# EAGLE board Panel (EAGLE 5.11), part 1 of 2
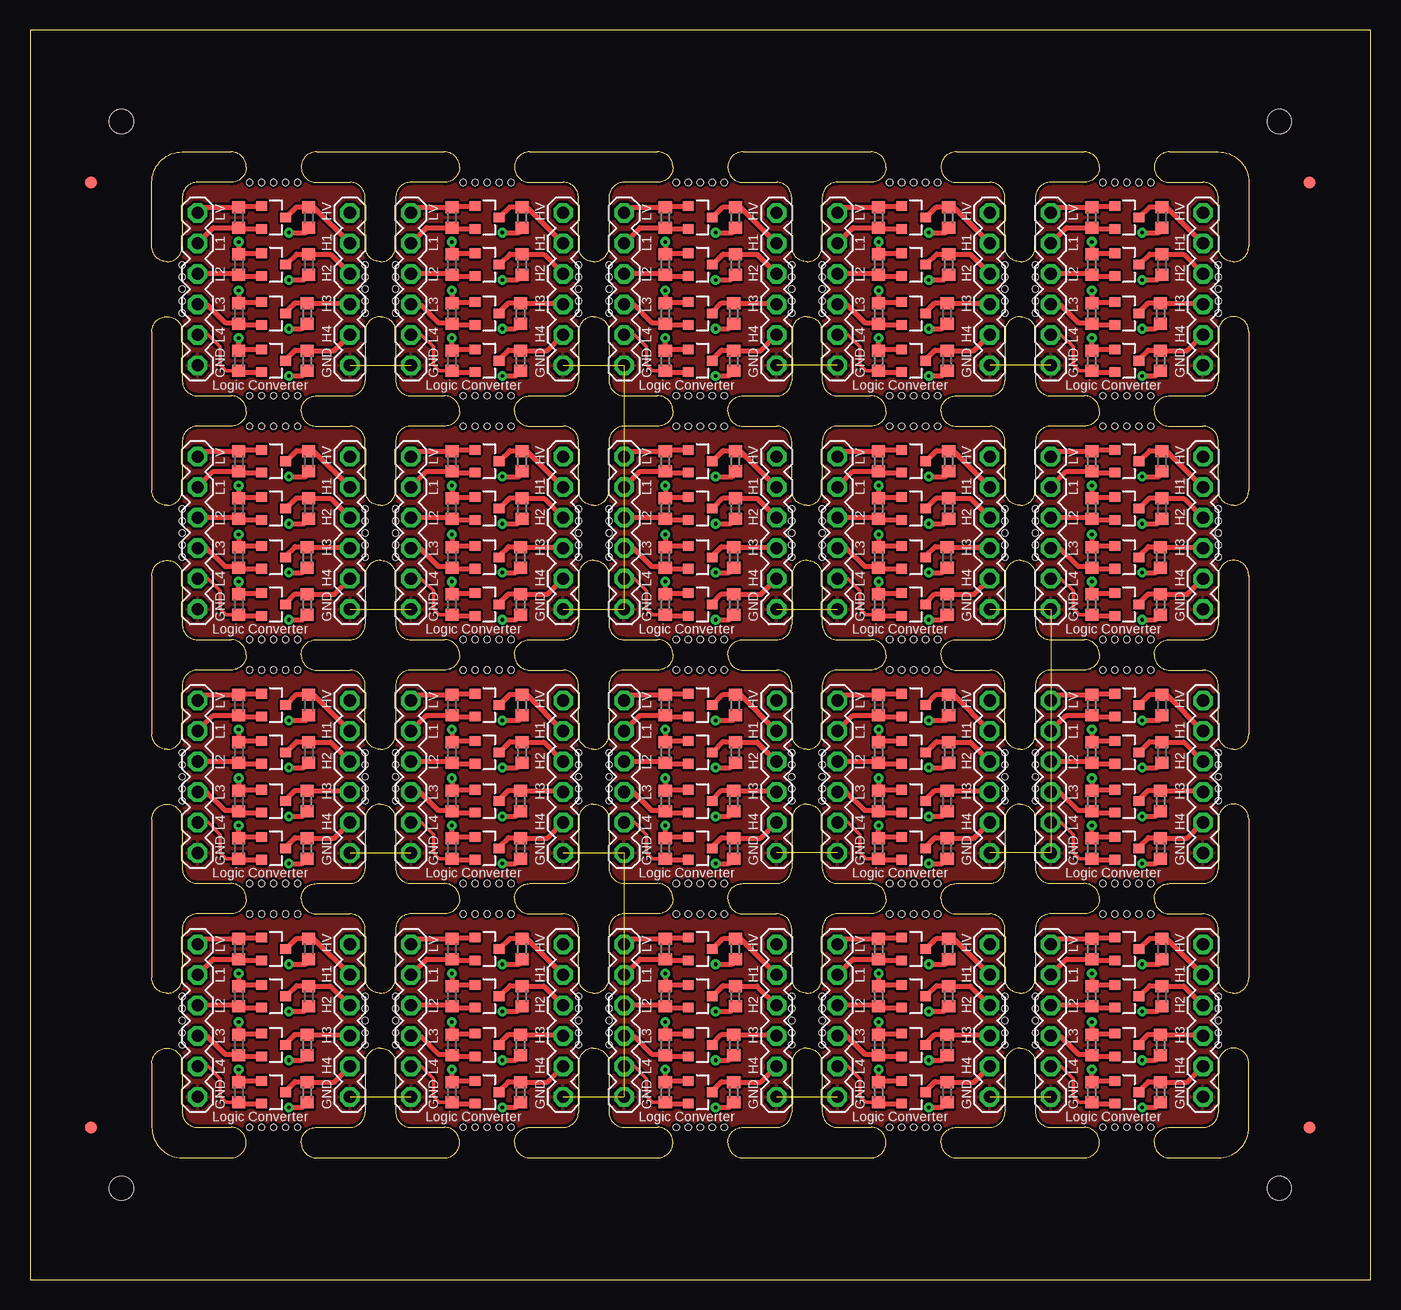
[diagram p0: board, top side]
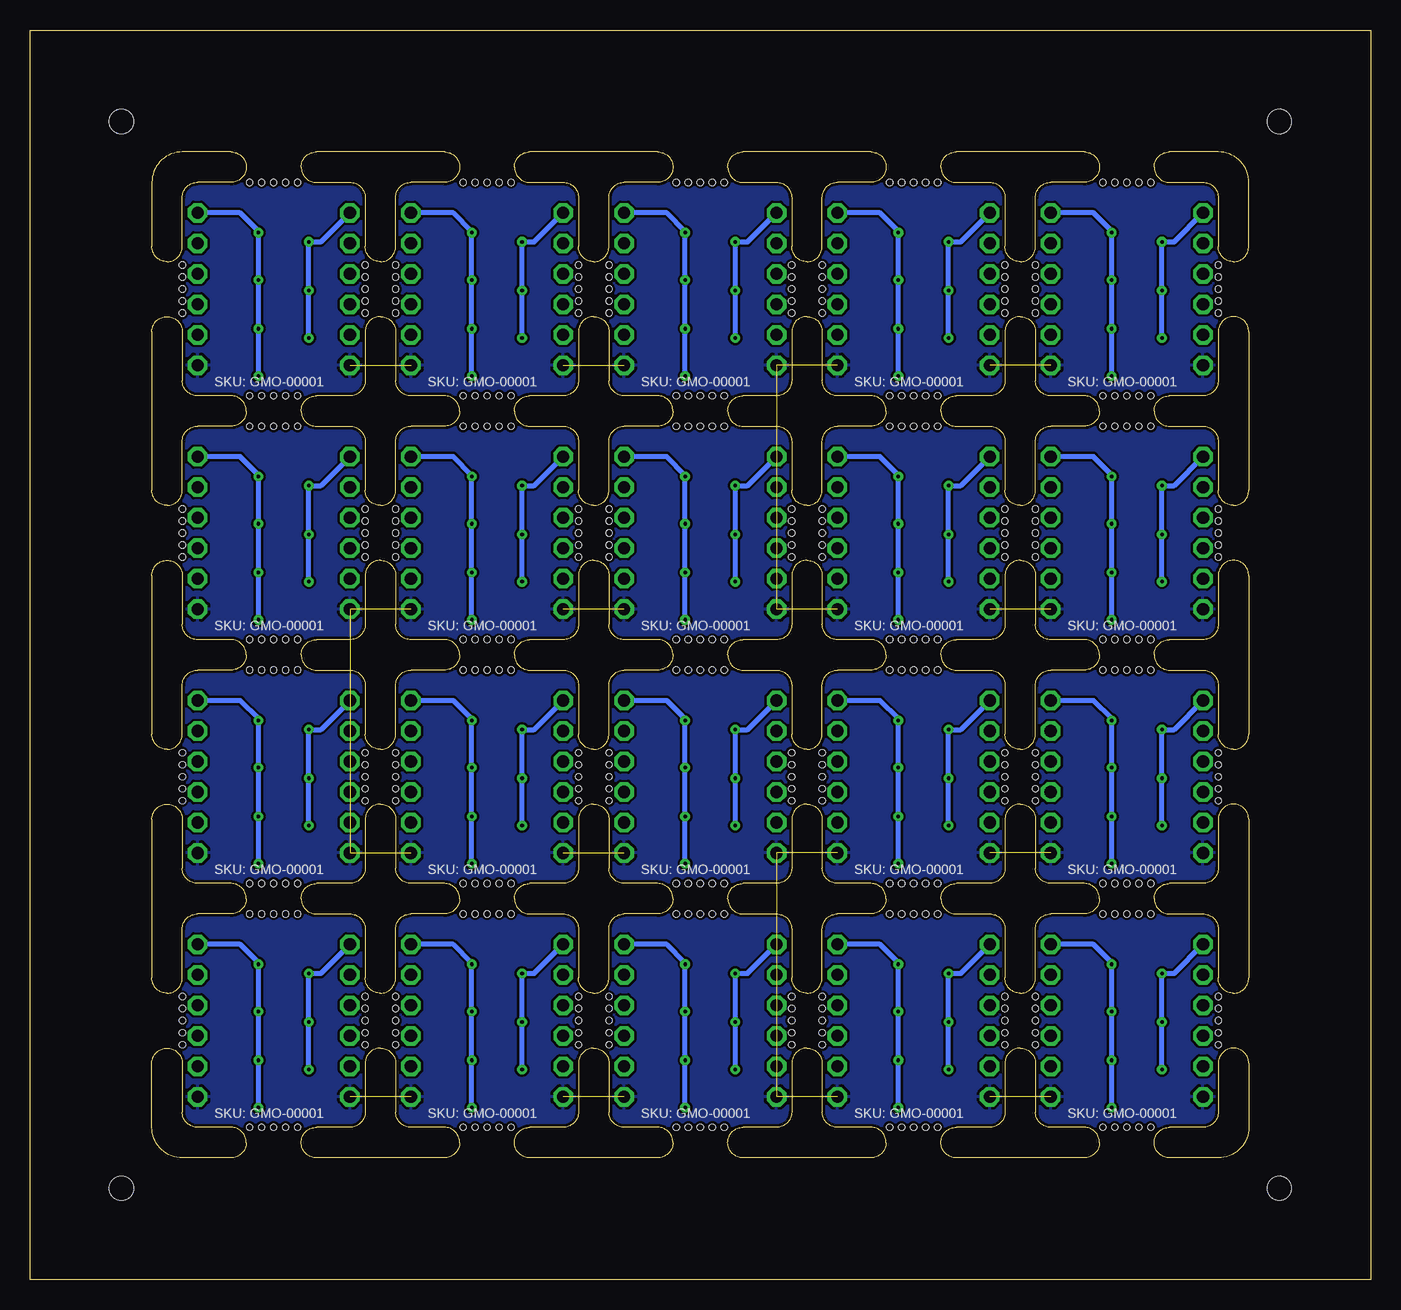
[diagram p1: board, bottom side, seen from below]

Size 111.76 x 104.14 mm. Coordinates in mm from the lower left corner, seen from the top.
Outline: 27.94,69.85 arc90 26.67,71.12
Outline: 27.94,69.85 27.94,65.79 arc90 29.21,64.52 arc90 30.48,65.79 30.48,69.85 arc-90 31.75,71.12 34.54,71.12 arc90 35.81,72.39 arc90 34.54,73.66 31.75,73.66 arc-90 30.48,74.93 30.48,78.99 arc90 29.21,80.26 arc90 27.94,78.99 27.94,74.93 arc-90 26.67,73.66 23.88,73.66 arc90 22.61,72.39 arc90 23.88,71.12 26.67,71.12
Outline: 27.94,69.85 arc90 26.67,71.12
Outline: 45.72,69.85 arc90 44.45,71.12
Outline: 45.72,69.85 45.72,65.79 arc90 46.99,64.52 arc90 48.26,65.79 48.26,69.85 arc-90 49.53,71.12 52.32,71.12 arc90 53.59,72.39 arc90 52.32,73.66 49.53,73.66 arc-90 48.26,74.93 48.26,78.99 arc90 46.99,80.26 arc90 45.72,78.99 45.72,74.93 arc-90 44.45,73.66 41.66,73.66 arc90 40.39,72.39 arc90 41.66,71.12 44.45,71.12
Outline: 45.72,69.85 arc90 44.45,71.12
Outline: 63.5,69.85 arc90 62.23,71.12
Outline: 63.5,69.85 63.5,65.79 arc90 64.77,64.52 arc90 66.04,65.79 66.04,69.85 arc-90 67.31,71.12 70.1,71.12 arc90 71.37,72.39 arc90 70.1,73.66 67.31,73.66 arc-90 66.04,74.93 66.04,78.99 arc90 64.77,80.26 arc90 63.5,78.99 63.5,74.93 arc-90 62.23,73.66 59.44,73.66 arc90 58.17,72.39 arc90 59.44,71.12 62.23,71.12
Outline: 63.5,69.85 arc90 62.23,71.12
Outline: 27.94,90.17 arc90 26.67,91.44
Outline: 27.94,90.17 27.94,86.11 arc90 29.21,84.84 arc90 30.48,86.11 30.48,90.17 arc-90 31.75,91.44 34.54,91.44 arc90 35.81,92.71 arc90 34.54,93.98 23.88,93.98 arc90 22.61,92.71 arc90 23.88,91.44 26.67,91.44
Outline: 27.94,90.17 arc90 26.67,91.44
Outline: 45.72,90.17 arc90 44.45,91.44
Outline: 45.72,90.17 45.72,86.11 arc90 46.99,84.84 arc90 48.26,86.11 48.26,90.17 arc-90 49.53,91.44 52.32,91.44 arc90 53.59,92.71 arc90 52.32,93.98 41.66,93.98 arc90 40.39,92.71 arc90 41.66,91.44 44.45,91.44
Outline: 45.72,90.17 arc90 44.45,91.44
Outline: 63.5,90.17 arc90 62.23,91.44
Outline: 63.5,90.17 63.5,86.11 arc90 64.77,84.84 arc90 66.04,86.11 66.04,90.17 arc-90 67.31,91.44 70.1,91.44 arc90 71.37,92.71 arc90 70.1,93.98 59.44,93.98 arc90 58.17,92.71 arc90 59.44,91.44 62.23,91.44
Outline: 63.5,90.17 arc90 62.23,91.44
Outline: 81.28,90.17 arc90 80.01,91.44
Outline: 81.28,90.17 81.28,86.11 arc90 82.55,84.84 arc90 83.82,86.11 83.82,90.17 arc-90 85.09,91.44 87.88,91.44 arc90 89.15,92.71 arc90 87.88,93.98 77.22,93.98 arc90 75.95,92.71 arc90 77.22,91.44 80.01,91.44
Outline: 81.28,90.17 arc90 80.01,91.44
Outline: 81.28,69.85 arc90 80.01,71.12
Outline: 81.28,69.85 81.28,65.79 arc90 82.55,64.52 arc90 83.82,65.79 83.82,69.85 arc-90 85.09,71.12 87.88,71.12 arc90 89.15,72.39 arc90 87.88,73.66 85.09,73.66 arc-90 83.82,74.93 83.82,78.99 arc90 82.55,80.26 arc90 81.28,78.99 81.28,74.93 arc-90 80.01,73.66 77.22,73.66 arc90 75.95,72.39 arc90 77.22,71.12 80.01,71.12
Outline: 81.28,69.85 arc90 80.01,71.12
Outline: 99.06,90.17 arc90 97.79,91.44
Outline: 99.06,90.17 99.06,86.11 arc90 100.33,84.84 arc90 101.6,86.11 101.6,91.44 arc90 99.06,93.98 95,93.98 arc90 93.73,92.71 arc90 95,91.44 97.79,91.44
Outline: 99.06,90.17 arc90 97.79,91.44
Outline: 99.06,69.85 arc90 97.79,71.12
Outline: 99.06,69.85 99.06,65.79 arc90 100.33,64.52 arc90 101.6,65.79 101.6,78.99 arc90 100.33,80.26 arc90 99.06,78.99 99.06,74.93 arc-90 97.79,73.66 95,73.66 arc90 93.73,72.39 arc90 95,71.12 97.79,71.12
Outline: 99.06,69.85 arc90 97.79,71.12
Outline: 27.94,29.21 arc90 26.67,30.48
Outline: 27.94,29.21 27.94,25.15 arc90 29.21,23.88 arc90 30.48,25.15 30.48,29.21 arc-90 31.75,30.48 34.54,30.48 arc90 35.81,31.75 arc90 34.54,33.02 31.75,33.02 arc-90 30.48,34.29 30.48,38.35 arc90 29.21,39.62 arc90 27.94,38.35 27.94,34.29 arc-90 26.67,33.02 23.88,33.02 arc90 22.61,31.75 arc90 23.88,30.48 26.67,30.48
Outline: 27.94,29.21 arc90 26.67,30.48
Outline: 45.72,29.21 arc90 44.45,30.48
Outline: 45.72,29.21 45.72,25.15 arc90 46.99,23.88 arc90 48.26,25.15 48.26,29.21 arc-90 49.53,30.48 52.32,30.48 arc90 53.59,31.75 arc90 52.32,33.02 49.53,33.02 arc-90 48.26,34.29 48.26,38.35 arc90 46.99,39.62 arc90 45.72,38.35 45.72,34.29 arc-90 44.45,33.02 41.66,33.02 arc90 40.39,31.75 arc90 41.66,30.48 44.45,30.48
Outline: 45.72,29.21 arc90 44.45,30.48
Outline: 63.5,29.21 arc90 62.23,30.48
Outline: 63.5,29.21 63.5,25.15 arc90 64.77,23.88 arc90 66.04,25.15 66.04,29.21 arc-90 67.31,30.48 70.1,30.48 arc90 71.37,31.75 arc90 70.1,33.02 67.31,33.02 arc-90 66.04,34.29 66.04,38.35 arc90 64.77,39.62 arc90 63.5,38.35 63.5,34.29 arc-90 62.23,33.02 59.44,33.02 arc90 58.17,31.75 arc90 59.44,30.48 62.23,30.48
Outline: 63.5,29.21 arc90 62.23,30.48
Outline: 27.94,49.53 arc90 26.67,50.8
Outline: 27.94,49.53 27.94,45.47 arc90 29.21,44.2 arc90 30.48,45.47 30.48,49.53 arc-90 31.75,50.8 34.54,50.8 arc90 35.81,52.07 arc90 34.54,53.34 31.75,53.34 arc-90 30.48,54.61 30.48,58.67 arc90 29.21,59.94 arc90 27.94,58.67 27.94,54.61 arc-90 26.67,53.34 23.88,53.34 arc90 22.61,52.07 arc90 23.88,50.8 26.67,50.8
Outline: 27.94,49.53 arc90 26.67,50.8
Outline: 45.72,49.53 arc90 44.45,50.8
Outline: 45.72,49.53 45.72,45.47 arc90 46.99,44.2 arc90 48.26,45.47 48.26,49.53 arc-90 49.53,50.8 52.32,50.8 arc90 53.59,52.07 arc90 52.32,53.34 49.53,53.34 arc-90 48.26,54.61 48.26,58.67 arc90 46.99,59.94 arc90 45.72,58.67 45.72,54.61 arc-90 44.45,53.34 41.66,53.34 arc90 40.39,52.07 arc90 41.66,50.8 44.45,50.8
Outline: 45.72,49.53 arc90 44.45,50.8
Outline: 63.5,49.53 arc90 62.23,50.8
Outline: 63.5,49.53 63.5,45.47 arc90 64.77,44.2 arc90 66.04,45.47 66.04,49.53 arc-90 67.31,50.8 70.1,50.8 arc90 71.37,52.07 arc90 70.1,53.34 67.31,53.34 arc-90 66.04,54.61 66.04,58.67 arc90 64.77,59.94 arc90 63.5,58.67 63.5,54.61 arc-90 62.23,53.34 59.44,53.34 arc90 58.17,52.07 arc90 59.44,50.8 62.23,50.8
Outline: 63.5,49.53 arc90 62.23,50.8
Outline: 81.28,49.53 arc90 80.01,50.8
Outline: 81.28,49.53 81.28,45.47 arc90 82.55,44.2 arc90 83.82,45.47 83.82,49.53 arc-90 85.09,50.8 87.88,50.8 arc90 89.15,52.07 arc90 87.88,53.34 85.09,53.34 arc-90 83.82,54.61 83.82,58.67 arc90 82.55,59.94 arc90 81.28,58.67 81.28,54.61 arc-90 80.01,53.34 77.22,53.34 arc90 75.95,52.07 arc90 77.22,50.8 80.01,50.8
Outline: 81.28,49.53 arc90 80.01,50.8
Outline: 81.28,29.21 arc90 80.01,30.48
Outline: 81.28,29.21 81.28,25.15 arc90 82.55,23.88 arc90 83.82,25.15 83.82,29.21 arc-90 85.09,30.48 87.88,30.48 arc90 89.15,31.75 arc90 87.88,33.02 85.09,33.02 arc-90 83.82,34.29 83.82,38.35 arc90 82.55,39.62 arc90 81.28,38.35 81.28,34.29 arc-90 80.01,33.02 77.22,33.02 arc90 75.95,31.75 arc90 77.22,30.48 80.01,30.48
Outline: 81.28,29.21 arc90 80.01,30.48
Outline: 99.06,49.53 arc90 97.79,50.8
Outline: 99.06,49.53 99.06,45.47 arc90 100.33,44.2 arc90 101.6,45.47 101.6,58.67 arc90 100.33,59.94 arc90 99.06,58.67 99.06,54.61 arc-90 97.79,53.34 95,53.34 arc90 93.73,52.07 arc90 95,50.8 97.79,50.8
Outline: 99.06,49.53 arc90 97.79,50.8
Outline: 99.06,29.21 arc90 97.79,30.48
Outline: 99.06,29.21 99.06,25.15 arc90 100.33,23.88 arc90 101.6,25.15 101.6,38.35 arc90 100.33,39.62 arc90 99.06,38.35 99.06,34.29 arc-90 97.79,33.02 95,33.02 arc90 93.73,31.75 arc90 95,30.48 97.79,30.48
Outline: 99.06,29.21 arc90 97.79,30.48
Outline: 12.7,54.61 arc90 13.97,53.34 16.76,53.34 arc-90 18.03,52.07 arc-90 16.76,50.8 13.97,50.8 arc90 12.7,49.53 12.7,45.47 arc-90 11.43,44.2 arc-90 10.16,45.47 10.16,58.67 arc-90 11.43,59.94 arc-90 12.7,58.67 12.7,54.61
Outline: 13.97,71.12 arc90 12.7,69.85 12.7,65.79 arc-90 11.43,64.52 arc-90 10.16,65.79 10.16,78.99 arc-90 11.43,80.26 arc-90 12.7,78.99 12.7,74.93 arc90 13.97,73.66 16.76,73.66 arc-90 18.03,72.39 arc-90 16.76,71.12 13.97,71.12
Outline: 13.97,91.44 arc90 12.7,90.17 12.7,86.11 arc-90 11.43,84.84 arc-90 10.16,86.11 10.16,91.44 arc-90 12.7,93.98 16.76,93.98 arc-90 18.03,92.71 arc-90 16.76,91.44 13.97,91.44
Outline: 12.7,13.97 arc90 13.97,12.7 16.76,12.7 arc-90 18.03,11.43 arc-90 16.76,10.16 12.7,10.16 arc-90 10.16,12.7 10.16,18.03 arc-90 11.43,19.3 arc-90 12.7,18.03 12.7,13.97
Outline: 26.67,12.7 arc90 27.94,13.97 27.94,18.03 arc-90 29.21,19.3 arc-90 30.48,18.03 30.48,13.97 arc90 31.75,12.7 34.54,12.7 arc-90 35.81,11.43 arc-90 34.54,10.16 23.88,10.16 arc-90 22.61,11.43 arc-90 23.88,12.7 26.67,12.7
Outline: 13.97,30.48 arc90 12.7,29.21 12.7,25.15 arc-90 11.43,23.88 arc-90 10.16,25.15 10.16,38.35 arc-90 11.43,39.62 arc-90 12.7,38.35 12.7,34.29 arc90 13.97,33.02 16.76,33.02 arc-90 18.03,31.75 arc-90 16.76,30.48 13.97,30.48
Outline: 44.45,12.7 arc90 45.72,13.97 45.72,18.03 arc-90 46.99,19.3 arc-90 48.26,18.03 48.26,13.97 arc90 49.53,12.7 52.32,12.7 arc-90 53.59,11.43 arc-90 52.32,10.16 41.66,10.16 arc-90 40.39,11.43 arc-90 41.66,12.7 44.45,12.7
Outline: 62.23,12.7 arc90 63.5,13.97 63.5,18.03 arc-90 64.77,19.3 arc-90 66.04,18.03 66.04,13.97 arc90 67.31,12.7 70.1,12.7 arc-90 71.37,11.43 arc-90 70.1,10.16 59.44,10.16 arc-90 58.17,11.43 arc-90 59.44,12.7 62.23,12.7
Outline: 80.01,12.7 arc90 81.28,13.97 81.28,18.03 arc-90 82.55,19.3 arc-90 83.82,18.03 83.82,13.97 arc90 85.09,12.7 87.88,12.7 arc-90 89.15,11.43 arc-90 87.88,10.16 77.22,10.16 arc-90 75.95,11.43 arc-90 77.22,12.7 80.01,12.7
Outline: 97.79,12.7 arc90 99.06,13.97 99.06,18.03 arc-90 100.33,19.3 arc-90 101.6,18.03 101.6,12.7 arc-90 99.06,10.16 95,10.16 arc-90 93.73,11.43 arc-90 95,12.7 97.79,12.7
Outline: 0,0 111.76,0 111.76,104.14 0,104.14 0,0
Copper layers (1*16): Top 0.035mm / dielectric 1.5mm / Bottom 0.035mm
Design rules "SparkFun": minimum track width 8mil, minimum drill 20mil, track to track 8mil, track to pad 8mil, pad to pad 8mil, via to via 8mil, smd to smd 8mil, copper to edge 10mil, drill to drill 8mil, minimum pad ring 12mil, minimum via ring 10mil, stop-mask expansion 4mil, vias tented up to drill 25mil, thermal gap 10mil
Holes 0.5 mm at 19.32,71.12 18.32,71.12 20.32,71.12 21.32,71.12 22.32,71.12 21.32,53.34 22.32,53.34 20.32,53.34 19.32,53.34 18.32,53.34 27.94,63.23 27.94,64.23 27.94,62.23 27.94,61.23 27.94,60.23 12.7,61.23 12.7,60.23 12.7,62.23 12.7,63.23 12.7,64.23 37.1,71.12 36.1,71.12 38.1,71.12 39.1,71.12 40.1,71.12 39.1,53.34 40.1,53.34 38.1,53.34 37.1,53.34 36.1,53.34 45.72,63.23 45.72,64.23 45.72,62.23 45.72,61.23 45.72,60.23 30.48,61.23 30.48,60.23 30.48,62.23 30.48,63.23 30.48,64.23 54.88,71.12 53.88,71.12 55.88,71.12 56.88,71.12 57.88,71.12 56.88,53.34 57.88,53.34 55.88,53.34 54.88,53.34 53.88,53.34 63.5,63.23 63.5,64.23 63.5,62.23 63.5,61.23 63.5,60.23 48.26,61.23 48.26,60.23 48.26,62.23 48.26,63.23 48.26,64.23 19.32,91.44 18.32,91.44 20.32,91.44 21.32,91.44 22.32,91.44 21.32,73.66 22.32,73.66 20.32,73.66 19.32,73.66 18.32,73.66 27.94,83.55 27.94,84.55 27.94,82.55 27.94,81.55 27.94,80.55 12.7,81.55 12.7,80.55 12.7,82.55 12.7,83.55 12.7,84.55 37.1,91.44 36.1,91.44 38.1,91.44 39.1,91.44 40.1,91.44 39.1,73.66 40.1,73.66 38.1,73.66 37.1,73.66 36.1,73.66 45.72,83.55 45.72,84.55 45.72,82.55 45.72,81.55 45.72,80.55 30.48,81.55 30.48,80.55 30.48,82.55 30.48,83.55 30.48,84.55 54.88,91.44 53.88,91.44 55.88,91.44 56.88,91.44 57.88,91.44 56.88,73.66 57.88,73.66 55.88,73.66 54.88,73.66 53.88,73.66 63.5,83.55 63.5,84.55 63.5,82.55 63.5,81.55 63.5,80.55 48.26,81.55 48.26,80.55 48.26,82.55 48.26,83.55 48.26,84.55 72.66,91.44 71.66,91.44 73.66,91.44 74.66,91.44 75.66,91.44 74.66,73.66 75.66,73.66 73.66,73.66 72.66,73.66 71.66,73.66 81.28,83.55 81.28,84.55 81.28,82.55 81.28,81.55 81.28,80.55 66.04,81.55 66.04,80.55 66.04,82.55 66.04,83.55 66.04,84.55 72.66,71.12 71.66,71.12 73.66,71.12 74.66,71.12 75.66,71.12 74.66,53.34 75.66,53.34 73.66,53.34 72.66,53.34 71.66,53.34 81.28,63.23 81.28,64.23 81.28,62.23 81.28,61.23 81.28,60.23 66.04,61.23 66.04,60.23 66.04,62.23 66.04,63.23 66.04,64.23 90.44,91.44 89.44,91.44 91.44,91.44 92.44,91.44 93.44,91.44 92.44,73.66 93.44,73.66 91.44,73.66 90.44,73.66 89.44,73.66 99.06,83.55 99.06,84.55 99.06,82.55 99.06,81.55 99.06,80.55 83.82,81.55 83.82,80.55 83.82,82.55 83.82,83.55 83.82,84.55 90.44,71.12 89.44,71.12 91.44,71.12 92.44,71.12 93.44,71.12 92.44,53.34 93.44,53.34 91.44,53.34 90.44,53.34 89.44,53.34 99.06,63.23 99.06,64.23 99.06,62.23 99.06,61.23 99.06,60.23 83.82,61.23 83.82,60.23 83.82,62.23 83.82,63.23 83.82,64.23 19.32,30.48 18.32,30.48 20.32,30.48 21.32,30.48 22.32,30.48 21.32,12.7 22.32,12.7 20.32,12.7 19.32,12.7 18.32,12.7 27.94,22.59 27.94,23.59 27.94,21.59 27.94,20.59 27.94,19.59 12.7,20.59 12.7,19.59 12.7,21.59 12.7,22.59 12.7,23.59 37.1,30.48 36.1,30.48 38.1,30.48 39.1,30.48 40.1,30.48 39.1,12.7 40.1,12.7 38.1,12.7 37.1,12.7 36.1,12.7 45.72,22.59 45.72,23.59 45.72,21.59 45.72,20.59 45.72,19.59 30.48,20.59 30.48,19.59 30.48,21.59 30.48,22.59 30.48,23.59 54.88,30.48 53.88,30.48 55.88,30.48 56.88,30.48 57.88,30.48 56.88,12.7 57.88,12.7 55.88,12.7 54.88,12.7 53.88,12.7 63.5,22.59 63.5,23.59 63.5,21.59 63.5,20.59 63.5,19.59 48.26,20.59 48.26,19.59 48.26,21.59 48.26,22.59 48.26,23.59 19.32,50.8 18.32,50.8 20.32,50.8 21.32,50.8 22.32,50.8 21.32,33.02 22.32,33.02 20.32,33.02 19.32,33.02 18.32,33.02 27.94,42.91 27.94,43.91 27.94,41.91 27.94,40.91 27.94,39.91 12.7,40.91 12.7,39.91 12.7,41.91 12.7,42.91 12.7,43.91 37.1,50.8 36.1,50.8 38.1,50.8 39.1,50.8 40.1,50.8 39.1,33.02 40.1,33.02 38.1,33.02 37.1,33.02 36.1,33.02 45.72,42.91 45.72,43.91 45.72,41.91 45.72,40.91 45.72,39.91 30.48,40.91 30.48,39.91 30.48,41.91 30.48,42.91 30.48,43.91 54.88,50.8 53.88,50.8 55.88,50.8 56.88,50.8 57.88,50.8 56.88,33.02 57.88,33.02 55.88,33.02 54.88,33.02 53.88,33.02 63.5,42.91 63.5,43.91 63.5,41.91 63.5,40.91 63.5,39.91 48.26,40.91 48.26,39.91 48.26,41.91 48.26,42.91 48.26,43.91 72.66,50.8 71.66,50.8 73.66,50.8 74.66,50.8 75.66,50.8 74.66,33.02 75.66,33.02 73.66,33.02 72.66,33.02 71.66,33.02 81.28,42.91 81.28,43.91 81.28,41.91 81.28,40.91 81.28,39.91 66.04,40.91 66.04,39.91 66.04,41.91 66.04,42.91 66.04,43.91 72.66,30.48 71.66,30.48 73.66,30.48 74.66,30.48 75.66,30.48 74.66,12.7 75.66,12.7 73.66,12.7 72.66,12.7 71.66,12.7 81.28,22.59 81.28,23.59 81.28,21.59 81.28,20.59 81.28,19.59 66.04,20.59 66.04,19.59 66.04,21.59 66.04,22.59 66.04,23.59 90.44,50.8 89.44,50.8 91.44,50.8 92.44,50.8 93.44,50.8 92.44,33.02 93.44,33.02 91.44,33.02 90.44,33.02 89.44,33.02 99.06,42.91 99.06,43.91 99.06,41.91 99.06,40.91 99.06,39.91 83.82,40.91 83.82,39.91 83.82,41.91 83.82,42.91 83.82,43.91 90.44,30.48 89.44,30.48 91.44,30.48 92.44,30.48 93.44,30.48 92.44,12.7 93.44,12.7 91.44,12.7 90.44,12.7 89.44,12.7 99.06,22.59 99.06,23.59 99.06,21.59 99.06,20.59 99.06,19.59 83.82,20.59 83.82,19.59 83.82,21.59 83.82,22.59 83.82,23.59
Holes 2 mm at 7.62,96.52 104.14,96.52 104.14,7.62 7.62,7.62

## Footprints (pad centres in the part's own frame; a part is rotated, then mirrored left to right if it is on the bottom)
MA06-1-OCTAGON = drill 1.016 octagon: 1 -6.35,0; 2 -3.81,0; 3 -1.27,0; 4 1.27,0; 5 3.81,0; 6 6.35,0
FIDUCIAL = smd 1 x 1: P$1 0,0
R0603 = smd 1 x 1.1: 1 -0.85,0; 2 0.85,0
SOT23 = smd 0.8 x 0.9: 1 -0.95,-1; 2 0.95,-1; 3 0,1

## Placement (x,y rotation side)
CON1  LOW VOLTAGE  [MA06-1-OCTAGON]  13.97,62.23 270 top
CON2  HIGH VOLTAGE  [MA06-1-OCTAGON]  26.67,62.23 270 top
CON3  LOW VOLTAGE  [MA06-1-OCTAGON]  31.75,62.23 270 top
CON4  HIGH VOLTAGE  [MA06-1-OCTAGON]  44.45,62.23 270 top
CON5  LOW VOLTAGE  [MA06-1-OCTAGON]  49.53,62.23 270 top
CON6  HIGH VOLTAGE  [MA06-1-OCTAGON]  62.23,62.23 270 top
CON7  LOW VOLTAGE  [MA06-1-OCTAGON]  13.97,82.55 270 top
CON8  HIGH VOLTAGE  [MA06-1-OCTAGON]  26.67,82.55 270 top
CON9  LOW VOLTAGE  [MA06-1-OCTAGON]  31.75,82.55 270 top
CON10  HIGH VOLTAGE  [MA06-1-OCTAGON]  44.45,82.55 270 top
CON11  LOW VOLTAGE  [MA06-1-OCTAGON]  49.53,82.55 270 top
CON12  HIGH VOLTAGE  [MA06-1-OCTAGON]  62.23,82.55 270 top
CON13  LOW VOLTAGE  [MA06-1-OCTAGON]  67.31,82.55 270 top
CON14  HIGH VOLTAGE  [MA06-1-OCTAGON]  80.01,82.55 270 top
CON15  LOW VOLTAGE  [MA06-1-OCTAGON]  67.31,62.23 270 top
CON16  HIGH VOLTAGE  [MA06-1-OCTAGON]  80.01,62.23 270 top
CON17  LOW VOLTAGE  [MA06-1-OCTAGON]  85.09,82.55 270 top
CON18  HIGH VOLTAGE  [MA06-1-OCTAGON]  97.79,82.55 270 top
CON19  LOW VOLTAGE  [MA06-1-OCTAGON]  85.09,62.23 270 top
CON20  HIGH VOLTAGE  [MA06-1-OCTAGON]  97.79,62.23 270 top
CON21  LOW VOLTAGE  [MA06-1-OCTAGON]  13.97,21.59 270 top
CON22  HIGH VOLTAGE  [MA06-1-OCTAGON]  26.67,21.59 270 top
CON23  LOW VOLTAGE  [MA06-1-OCTAGON]  31.75,21.59 270 top
CON24  HIGH VOLTAGE  [MA06-1-OCTAGON]  44.45,21.59 270 top
CON25  LOW VOLTAGE  [MA06-1-OCTAGON]  49.53,21.59 270 top
CON26  HIGH VOLTAGE  [MA06-1-OCTAGON]  62.23,21.59 270 top
CON27  LOW VOLTAGE  [MA06-1-OCTAGON]  13.97,41.91 270 top
CON28  HIGH VOLTAGE  [MA06-1-OCTAGON]  26.67,41.91 270 top
CON29  LOW VOLTAGE  [MA06-1-OCTAGON]  31.75,41.91 270 top
CON30  HIGH VOLTAGE  [MA06-1-OCTAGON]  44.45,41.91 270 top
CON31  LOW VOLTAGE  [MA06-1-OCTAGON]  49.53,41.91 270 top
CON32  HIGH VOLTAGE  [MA06-1-OCTAGON]  62.23,41.91 270 top
CON33  LOW VOLTAGE  [MA06-1-OCTAGON]  67.31,41.91 270 top
CON34  HIGH VOLTAGE  [MA06-1-OCTAGON]  80.01,41.91 270 top
CON35  LOW VOLTAGE  [MA06-1-OCTAGON]  67.31,21.59 270 top
CON36  HIGH VOLTAGE  [MA06-1-OCTAGON]  80.01,21.59 270 top
CON37  LOW VOLTAGE  [MA06-1-OCTAGON]  85.09,41.91 270 top
CON38  HIGH VOLTAGE  [MA06-1-OCTAGON]  97.79,41.91 270 top
CON39  LOW VOLTAGE  [MA06-1-OCTAGON]  85.09,21.59 270 top
CON40  HIGH VOLTAGE  [MA06-1-OCTAGON]  97.79,21.59 270 top
E$1  [FIDUCIAL]  5.08,91.44 0 top
E$2  [FIDUCIAL]  106.68,12.7 0 top
E$3  [FIDUCIAL]  106.68,91.44 0 top
E$4  [FIDUCIAL]  5.08,12.7 0 top
R1  10K  [R0603]  17.4,68.2 90 top
R2  10K  [R0603]  23.24,68.2 270 top
R3  10K  [R0603]  17.4,64.26 90 top
R4  10K  [R0603]  23.24,64.26 270 top
R5  10K  [R0603]  17.4,60.2 90 top
R6  10K  [R0603]  23.11,60.2 270 top
R7  10K  [R0603]  17.4,56.26 90 top
R8  10K  [R0603]  23.11,56.26 270 top
R9  10K  [R0603]  35.18,68.2 90 top
R10  10K  [R0603]  41.02,68.2 270 top
R11  10K  [R0603]  35.18,64.26 90 top
R12  10K  [R0603]  41.02,64.26 270 top
R13  10K  [R0603]  35.18,60.2 90 top
R14  10K  [R0603]  40.89,60.2 270 top
R15  10K  [R0603]  35.18,56.26 90 top
R16  10K  [R0603]  40.89,56.26 270 top
R17  10K  [R0603]  52.96,68.2 90 top
R18  10K  [R0603]  58.8,68.2 270 top
R19  10K  [R0603]  52.96,64.26 90 top
R20  10K  [R0603]  58.8,64.26 270 top
R21  10K  [R0603]  52.96,60.2 90 top
R22  10K  [R0603]  58.67,60.2 270 top
R23  10K  [R0603]  52.96,56.26 90 top
R24  10K  [R0603]  58.67,56.26 270 top
R25  10K  [R0603]  17.4,88.52 90 top
R26  10K  [R0603]  23.24,88.52 270 top
R27  10K  [R0603]  17.4,84.58 90 top
R28  10K  [R0603]  23.24,84.58 270 top
R29  10K  [R0603]  17.4,80.52 90 top
R30  10K  [R0603]  23.11,80.52 270 top
R31  10K  [R0603]  17.4,76.58 90 top
R32  10K  [R0603]  23.11,76.58 270 top
R33  10K  [R0603]  35.18,88.52 90 top
R34  10K  [R0603]  41.02,88.52 270 top
R35  10K  [R0603]  35.18,84.58 90 top
R36  10K  [R0603]  41.02,84.58 270 top
R37  10K  [R0603]  35.18,80.52 90 top
R38  10K  [R0603]  40.89,80.52 270 top
R39  10K  [R0603]  35.18,76.58 90 top
R40  10K  [R0603]  40.89,76.58 270 top
R41  10K  [R0603]  52.96,88.52 90 top
R42  10K  [R0603]  58.8,88.52 270 top
R43  10K  [R0603]  52.96,84.58 90 top
R44  10K  [R0603]  58.8,84.58 270 top
R45  10K  [R0603]  52.96,80.52 90 top
R46  10K  [R0603]  58.67,80.52 270 top
R47  10K  [R0603]  52.96,76.58 90 top
R48  10K  [R0603]  58.67,76.58 270 top
R49  10K  [R0603]  70.74,88.52 90 top
R50  10K  [R0603]  76.58,88.52 270 top
R51  10K  [R0603]  70.74,84.58 90 top
R52  10K  [R0603]  76.58,84.58 270 top
R53  10K  [R0603]  70.74,80.52 90 top
R54  10K  [R0603]  76.45,80.52 270 top
R55  10K  [R0603]  70.74,76.58 90 top
R56  10K  [R0603]  76.45,76.58 270 top
R57  10K  [R0603]  70.74,68.2 90 top
R58  10K  [R0603]  76.58,68.2 270 top
R59  10K  [R0603]  70.74,64.26 90 top
R60  10K  [R0603]  76.58,64.26 270 top
R61  10K  [R0603]  70.74,60.2 90 top
R62  10K  [R0603]  76.45,60.2 270 top
R63  10K  [R0603]  70.74,56.26 90 top
R64  10K  [R0603]  76.45,56.26 270 top
R65  10K  [R0603]  88.52,88.52 90 top
R66  10K  [R0603]  94.36,88.52 270 top
R67  10K  [R0603]  88.52,84.58 90 top
R68  10K  [R0603]  94.36,84.58 270 top
R69  10K  [R0603]  88.52,80.52 90 top
R70  10K  [R0603]  94.23,80.52 270 top
R71  10K  [R0603]  88.52,76.58 90 top
R72  10K  [R0603]  94.23,76.58 270 top
R73  10K  [R0603]  88.52,68.2 90 top
R74  10K  [R0603]  94.36,68.2 270 top
R75  10K  [R0603]  88.52,64.26 90 top
R76  10K  [R0603]  94.36,64.26 270 top
R77  10K  [R0603]  88.52,60.2 90 top
R78  10K  [R0603]  94.23,60.2 270 top
R79  10K  [R0603]  88.52,56.26 90 top
R80  10K  [R0603]  94.23,56.26 270 top
R81  10K  [R0603]  17.4,27.56 90 top
R82  10K  [R0603]  23.24,27.56 270 top
R83  10K  [R0603]  17.4,23.62 90 top
R84  10K  [R0603]  23.24,23.62 270 top
R85  10K  [R0603]  17.4,19.56 90 top
R86  10K  [R0603]  23.11,19.56 270 top
R87  10K  [R0603]  17.4,15.62 90 top
R88  10K  [R0603]  23.11,15.62 270 top
R89  10K  [R0603]  35.18,27.56 90 top
R90  10K  [R0603]  41.02,27.56 270 top
R91  10K  [R0603]  35.18,23.62 90 top
R92  10K  [R0603]  41.02,23.62 270 top
R93  10K  [R0603]  35.18,19.56 90 top
R94  10K  [R0603]  40.89,19.56 270 top
R95  10K  [R0603]  35.18,15.62 90 top
R96  10K  [R0603]  40.89,15.62 270 top
R97  10K  [R0603]  52.96,27.56 90 top
R98  10K  [R0603]  58.8,27.56 270 top
R99  10K  [R0603]  52.96,23.62 90 top
R100  10K  [R0603]  58.8,23.62 270 top
R101  10K  [R0603]  52.96,19.56 90 top
R102  10K  [R0603]  58.67,19.56 270 top
R103  10K  [R0603]  52.96,15.62 90 top
R104  10K  [R0603]  58.67,15.62 270 top
R105  10K  [R0603]  17.4,47.88 90 top
R106  10K  [R0603]  23.24,47.88 270 top
R107  10K  [R0603]  17.4,43.94 90 top
R108  10K  [R0603]  23.24,43.94 270 top
R109  10K  [R0603]  17.4,39.88 90 top
R110  10K  [R0603]  23.11,39.88 270 top
R111  10K  [R0603]  17.4,35.94 90 top
R112  10K  [R0603]  23.11,35.94 270 top
R113  10K  [R0603]  35.18,47.88 90 top
R114  10K  [R0603]  41.02,47.88 270 top
R115  10K  [R0603]  35.18,43.94 90 top
R116  10K  [R0603]  41.02,43.94 270 top
R117  10K  [R0603]  35.18,39.88 90 top
R118  10K  [R0603]  40.89,39.88 270 top
R119  10K  [R0603]  35.18,35.94 90 top
R120  10K  [R0603]  40.89,35.94 270 top
R121  10K  [R0603]  52.96,47.88 90 top
R122  10K  [R0603]  58.8,47.88 270 top
R123  10K  [R0603]  52.96,43.94 90 top
R124  10K  [R0603]  58.8,43.94 270 top
R125  10K  [R0603]  52.96,39.88 90 top
R126  10K  [R0603]  58.67,39.88 270 top
R127  10K  [R0603]  52.96,35.94 90 top
R128  10K  [R0603]  58.67,35.94 270 top
R129  10K  [R0603]  70.74,47.88 90 top
R130  10K  [R0603]  76.58,47.88 270 top
R131  10K  [R0603]  70.74,43.94 90 top
R132  10K  [R0603]  76.58,43.94 270 top
R133  10K  [R0603]  70.74,39.88 90 top
R134  10K  [R0603]  76.45,39.88 270 top
R135  10K  [R0603]  70.74,35.94 90 top
R136  10K  [R0603]  76.45,35.94 270 top
R137  10K  [R0603]  70.74,27.56 90 top
R138  10K  [R0603]  76.58,27.56 270 top
R139  10K  [R0603]  70.74,23.62 90 top
R140  10K  [R0603]  76.58,23.62 270 top
R141  10K  [R0603]  70.74,19.56 90 top
R142  10K  [R0603]  76.45,19.56 270 top
R143  10K  [R0603]  70.74,15.62 90 top
R144  10K  [R0603]  76.45,15.62 270 top
R145  10K  [R0603]  88.52,47.88 90 top
R146  10K  [R0603]  94.36,47.88 270 top
R147  10K  [R0603]  88.52,43.94 90 top
R148  10K  [R0603]  94.36,43.94 270 top
R149  10K  [R0603]  88.52,39.88 90 top
R150  10K  [R0603]  94.23,39.88 270 top
R151  10K  [R0603]  88.52,35.94 90 top
R152  10K  [R0603]  94.23,35.94 270 top
R153  10K  [R0603]  88.52,27.56 90 top
R154  10K  [R0603]  94.36,27.56 270 top
R155  10K  [R0603]  88.52,23.62 90 top
R156  10K  [R0603]  94.36,23.62 270 top
R157  10K  [R0603]  88.52,19.56 90 top
R158  10K  [R0603]  94.23,19.56 270 top
R159  10K  [R0603]  88.52,15.62 90 top
R160  10K  [R0603]  94.23,15.62 270 top
TR1  BSS138  [SOT23]  20.32,68.2 270 top
TR2  BSS138  [SOT23]  20.32,64.26 270 top
TR3  BSS138  [SOT23]  20.32,60.2 270 top
TR4  BSS138  [SOT23]  20.32,56.26 270 top
TR5  BSS138  [SOT23]  38.1,68.2 270 top
TR6  BSS138  [SOT23]  38.1,64.26 270 top
TR7  BSS138  [SOT23]  38.1,60.2 270 top
TR8  BSS138  [SOT23]  38.1,56.26 270 top
TR9  BSS138  [SOT23]  55.88,68.2 270 top
TR10  BSS138  [SOT23]  55.88,64.26 270 top
TR11  BSS138  [SOT23]  55.88,60.2 270 top
TR12  BSS138  [SOT23]  55.88,56.26 270 top
TR13  BSS138  [SOT23]  20.32,88.52 270 top
TR14  BSS138  [SOT23]  20.32,84.58 270 top
TR15  BSS138  [SOT23]  20.32,80.52 270 top
TR16  BSS138  [SOT23]  20.32,76.58 270 top
TR17  BSS138  [SOT23]  38.1,88.52 270 top
TR18  BSS138  [SOT23]  38.1,84.58 270 top
TR19  BSS138  [SOT23]  38.1,80.52 270 top
TR20  BSS138  [SOT23]  38.1,76.58 270 top
TR21  BSS138  [SOT23]  55.88,88.52 270 top
TR22  BSS138  [SOT23]  55.88,84.58 270 top
TR23  BSS138  [SOT23]  55.88,80.52 270 top
TR24  BSS138  [SOT23]  55.88,76.58 270 top
TR25  BSS138  [SOT23]  73.66,88.52 270 top
TR26  BSS138  [SOT23]  73.66,84.58 270 top
TR27  BSS138  [SOT23]  73.66,80.52 270 top
TR28  BSS138  [SOT23]  73.66,76.58 270 top
TR29  BSS138  [SOT23]  73.66,68.2 270 top
TR30  BSS138  [SOT23]  73.66,64.26 270 top
TR31  BSS138  [SOT23]  73.66,60.2 270 top
TR32  BSS138  [SOT23]  73.66,56.26 270 top
TR33  BSS138  [SOT23]  91.44,88.52 270 top
TR34  BSS138  [SOT23]  91.44,84.58 270 top
TR35  BSS138  [SOT23]  91.44,80.52 270 top
TR36  BSS138  [SOT23]  91.44,76.58 270 top
TR37  BSS138  [SOT23]  91.44,68.2 270 top
TR38  BSS138  [SOT23]  91.44,64.26 270 top
TR39  BSS138  [SOT23]  91.44,60.2 270 top
TR40  BSS138  [SOT23]  91.44,56.26 270 top
TR41  BSS138  [SOT23]  20.32,27.56 270 top
TR42  BSS138  [SOT23]  20.32,23.62 270 top
TR43  BSS138  [SOT23]  20.32,19.56 270 top
TR44  BSS138  [SOT23]  20.32,15.62 270 top
TR45  BSS138  [SOT23]  38.1,27.56 270 top
TR46  BSS138  [SOT23]  38.1,23.62 270 top
TR47  BSS138  [SOT23]  38.1,19.56 270 top
TR48  BSS138  [SOT23]  38.1,15.62 270 top
TR49  BSS138  [SOT23]  55.88,27.56 270 top
TR50  BSS138  [SOT23]  55.88,23.62 270 top
TR51  BSS138  [SOT23]  55.88,19.56 270 top
TR52  BSS138  [SOT23]  55.88,15.62 270 top
TR53  BSS138  [SOT23]  20.32,47.88 270 top
TR54  BSS138  [SOT23]  20.32,43.94 270 top
TR55  BSS138  [SOT23]  20.32,39.88 270 top
TR56  BSS138  [SOT23]  20.32,35.94 270 top
TR57  BSS138  [SOT23]  38.1,47.88 270 top
TR58  BSS138  [SOT23]  38.1,43.94 270 top
TR59  BSS138  [SOT23]  38.1,39.88 270 top
TR60  BSS138  [SOT23]  38.1,35.94 270 top
TR61  BSS138  [SOT23]  55.88,47.88 270 top
TR62  BSS138  [SOT23]  55.88,43.94 270 top
TR63  BSS138  [SOT23]  55.88,39.88 270 top
TR64  BSS138  [SOT23]  55.88,35.94 270 top
TR65  BSS138  [SOT23]  73.66,47.88 270 top
TR66  BSS138  [SOT23]  73.66,43.94 270 top
TR67  BSS138  [SOT23]  73.66,39.88 270 top
TR68  BSS138  [SOT23]  73.66,35.94 270 top
TR69  BSS138  [SOT23]  73.66,27.56 270 top
TR70  BSS138  [SOT23]  73.66,23.62 270 top
TR71  BSS138  [SOT23]  73.66,19.56 270 top
TR72  BSS138  [SOT23]  73.66,15.62 270 top
TR73  BSS138  [SOT23]  91.44,47.88 270 top
TR74  BSS138  [SOT23]  91.44,43.94 270 top
TR75  BSS138  [SOT23]  91.44,39.88 270 top
TR76  BSS138  [SOT23]  91.44,35.94 270 top
TR77  BSS138  [SOT23]  91.44,27.56 270 top
TR78  BSS138  [SOT23]  91.44,23.62 270 top
TR79  BSS138  [SOT23]  91.44,19.56 270 top
TR80  BSS138  [SOT23]  91.44,15.62 270 top

## Library data of the parts
CON1-CON40 E$1-E$4 TR1-TR80 = GeekAmmo
R1-R160 = resistor

## Nets
GND: CON1.6 CON2.6 CON3.6 CON4.6 CON5.6 CON6.6 CON7.6 CON8.6 CON9.6 CON10.6 CON11.6 CON12.6 CON13.6 CON14.6 CON15.6 CON16.6 CON17.6 CON18.6 CON19.6 CON20.6 CON21.6 CON22.6 CON23.6 CON24.6 CON25.6 CON26.6 CON27.6 CON28.6 CON29.6 CON30.6 CON31.6 CON32.6 CON33.6 CON34.6 CON35.6 CON36.6 CON37.6 CON38.6 CON39.6 CON40.6
H1: CON2.2 R2.1 TR1.3
H2: CON2.3 R4.1 TR2.3
H3: CON2.4 R6.1 TR3.3
H4: CON2.5 R8.1 TR4.3
H5: CON4.2 R10.1 TR5.3
H6: CON4.3 R12.1 TR6.3
H7: CON4.4 R14.1 TR7.3
H8: CON4.5 R16.1 TR8.3
H9: CON6.2 R18.1 TR9.3
H10: CON6.3 R20.1 TR10.3
H11: CON6.4 R22.1 TR11.3
H12: CON6.5 R24.1 TR12.3
H13: CON8.2 R26.1 TR13.3
H14: CON8.3 R28.1 TR14.3
H15: CON8.4 R30.1 TR15.3
H16: CON8.5 R32.1 TR16.3
H17: CON10.2 R34.1 TR17.3
H18: CON10.3 R36.1 TR18.3
H19: CON10.4 R38.1 TR19.3
H20: CON10.5 R40.1 TR20.3
H21: CON12.2 R42.1 TR21.3
H22: CON12.3 R44.1 TR22.3
H23: CON12.4 R46.1 TR23.3
H24: CON12.5 R48.1 TR24.3
H25: CON14.2 R50.1 TR25.3
H26: CON14.3 R52.1 TR26.3
H27: CON14.4 R54.1 TR27.3
H28: CON14.5 R56.1 TR28.3
H29: CON16.2 R58.1 TR29.3
H30: CON16.3 R60.1 TR30.3
H31: CON16.4 R62.1 TR31.3
H32: CON16.5 R64.1 TR32.3
H33: CON18.2 R66.1 TR33.3
H34: CON18.3 R68.1 TR34.3
H35: CON18.4 R70.1 TR35.3
H36: CON18.5 R72.1 TR36.3
H37: CON20.2 R74.1 TR37.3
H38: CON20.3 R76.1 TR38.3
H39: CON20.4 R78.1 TR39.3
H40: CON20.5 R80.1 TR40.3
H41: CON22.2 R82.1 TR41.3
H42: CON22.3 R84.1 TR42.3
H43: CON22.4 R86.1 TR43.3
H44: CON22.5 R88.1 TR44.3
H45: CON24.2 R90.1 TR45.3
H46: CON24.3 R92.1 TR46.3
H47: CON24.4 R94.1 TR47.3
H48: CON24.5 R96.1 TR48.3
H49: CON26.2 R98.1 TR49.3
H50: CON26.3 R100.1 TR50.3
H51: CON26.4 R102.1 TR51.3
H52: CON26.5 R104.1 TR52.3
H53: CON28.2 R106.1 TR53.3
H54: CON28.3 R108.1 TR54.3
H55: CON28.4 R110.1 TR55.3
H56: CON28.5 R112.1 TR56.3
H57: CON30.2 R114.1 TR57.3
H58: CON30.3 R116.1 TR58.3
H59: CON30.4 R118.1 TR59.3
H60: CON30.5 R120.1 TR60.3
H61: CON32.2 R122.1 TR61.3
H62: CON32.3 R124.1 TR62.3
H63: CON32.4 R126.1 TR63.3
H64: CON32.5 R128.1 TR64.3
H65: CON34.2 R130.1 TR65.3
H66: CON34.3 R132.1 TR66.3
H67: CON34.4 R134.1 TR67.3
H68: CON34.5 R136.1 TR68.3
H69: CON36.2 R138.1 TR69.3
H70: CON36.3 R140.1 TR70.3
H71: CON36.4 R142.1 TR71.3
H72: CON36.5 R144.1 TR72.3
H73: CON38.2 R146.1 TR73.3
H74: CON38.3 R148.1 TR74.3
H75: CON38.4 R150.1 TR75.3
H76: CON38.5 R152.1 TR76.3
H77: CON40.2 R154.1 TR77.3
H78: CON40.3 R156.1 TR78.3
H79: CON40.4 R158.1 TR79.3
H80: CON40.5 R160.1 TR80.3
HV: CON2.1 R2.2 R4.2 R6.2 R8.2
HV1: CON4.1 R10.2 R12.2 R14.2 R16.2
HV2: CON6.1 R18.2 R20.2 R22.2 R24.2
HV3: CON8.1 R26.2 R28.2 R30.2 R32.2
HV4: CON10.1 R34.2 R36.2 R38.2 R40.2
HV5: CON12.1 R42.2 R44.2 R46.2 R48.2
HV6: CON14.1 R50.2 R52.2 R54.2 R56.2
HV7: CON16.1 R58.2 R60.2 R62.2 R64.2
HV8: CON18.1 R66.2 R68.2 R70.2 R72.2
HV9: CON20.1 R74.2 R76.2 R78.2 R80.2
HV10: CON22.1 R82.2 R84.2 R86.2 R88.2
HV11: CON24.1 R90.2 R92.2 R94.2 R96.2
HV12: CON26.1 R98.2 R100.2 R102.2 R104.2
HV13: CON28.1 R106.2 R108.2 R110.2 R112.2
HV14: CON30.1 R114.2 R116.2 R118.2 R120.2
HV15: CON32.1 R122.2 R124.2 R126.2 R128.2
HV16: CON34.1 R130.2 R132.2 R134.2 R136.2
HV17: CON36.1 R138.2 R140.2 R142.2 R144.2
HV18: CON38.1 R146.2 R148.2 R150.2 R152.2
HV19: CON40.1 R154.2 R156.2 R158.2 R160.2
L1: CON1.2 R1.1 TR1.2
L2: CON1.3 R3.1 TR2.2
L3: CON1.4 R5.1 TR3.2
L4: CON1.5 R7.1 TR4.2
L5: CON3.2 R9.1 TR5.2
L6: CON3.4 R13.1 TR7.2
L7: CON3.5 R15.1 TR8.2
L8: CON3.3 R11.1 TR6.2
L9: CON5.2 R17.1 TR9.2
L10: CON5.4 R21.1 TR11.2
L11: CON5.5 R23.1 TR12.2
L12: CON5.3 R19.1 TR10.2
L13: CON7.2 R25.1 TR13.2
L14: CON7.4 R29.1 TR15.2
L15: CON7.5 R31.1 TR16.2
L16: CON7.3 R27.1 TR14.2
L17: CON9.2 R33.1 TR17.2
L18: CON9.4 R37.1 TR19.2
L19: CON9.5 R39.1 TR20.2
L20: CON9.3 R35.1 TR18.2
L21: CON11.2 R41.1 TR21.2
L22: CON11.4 R45.1 TR23.2
L23: CON11.5 R47.1 TR24.2
L24: CON11.3 R43.1 TR22.2
L25: CON13.2 R49.1 TR25.2
L26: CON13.4 R53.1 TR27.2
L27: CON13.5 R55.1 TR28.2
L28: CON13.3 R51.1 TR26.2
L29: CON15.2 R57.1 TR29.2
L30: CON15.4 R61.1 TR31.2
L31: CON15.5 R63.1 TR32.2
L32: CON15.3 R59.1 TR30.2
L33: CON17.2 R65.1 TR33.2
L34: CON17.4 R69.1 TR35.2
L35: CON17.5 R71.1 TR36.2
L36: CON17.3 R67.1 TR34.2
L37: CON19.2 R73.1 TR37.2
L38: CON19.4 R77.1 TR39.2
L39: CON19.5 R79.1 TR40.2
L40: CON19.3 R75.1 TR38.2
L41: CON21.2 R81.1 TR41.2
L42: CON21.4 R85.1 TR43.2
L43: CON21.5 R87.1 TR44.2
L44: CON21.3 R83.1 TR42.2
L45: CON23.2 R89.1 TR45.2
L46: CON23.4 R93.1 TR47.2
L47: CON23.5 R95.1 TR48.2
L48: CON23.3 R91.1 TR46.2
L49: CON25.2 R97.1 TR49.2
L50: CON25.4 R101.1 TR51.2
L51: CON25.5 R103.1 TR52.2
L52: CON25.3 R99.1 TR50.2
L53: CON27.2 R105.1 TR53.2
L54: CON27.4 R109.1 TR55.2
L55: CON27.5 R111.1 TR56.2
L56: CON27.3 R107.1 TR54.2
L57: CON29.2 R113.1 TR57.2
L58: CON29.4 R117.1 TR59.2
L59: CON29.5 R119.1 TR60.2
L60: CON29.3 R115.1 TR58.2
L61: CON31.2 R121.1 TR61.2
L62: CON31.4 R125.1 TR63.2
L63: CON31.5 R127.1 TR64.2
L64: CON31.3 R123.1 TR62.2
L65: CON33.2 R129.1 TR65.2
L66: CON33.4 R133.1 TR67.2
L67: CON33.5 R135.1 TR68.2
L68: CON33.3 R131.1 TR66.2
L69: CON35.2 R137.1 TR69.2
L70: CON35.4 R141.1 TR71.2
L71: CON35.5 R143.1 TR72.2
L72: CON35.3 R139.1 TR70.2
L73: CON37.2 R145.1 TR73.2
L74: CON37.4 R149.1 TR75.2
L75: CON37.5 R151.1 TR76.2
L76: CON37.3 R147.1 TR74.2
L77: CON39.2 R153.1 TR77.2
L78: CON39.4 R157.1 TR79.2
L79: CON39.5 R159.1 TR80.2
L80: CON39.3 R155.1 TR78.2
LV: CON1.1 R1.2 R3.2 R5.2 R7.2 TR1.1 TR2.1 TR3.1 TR4.1
LV1: CON3.1 R9.2 R11.2 R13.2 R15.2 TR5.1 TR6.1 TR7.1 TR8.1
LV2: CON5.1 R17.2 R19.2 R21.2 R23.2 TR9.1 TR10.1 TR11.1 TR12.1
LV3: CON7.1 R25.2 R27.2 R29.2 R31.2 TR13.1 TR14.1 TR15.1 TR16.1
LV4: CON9.1 R33.2 R35.2 R37.2 R39.2 TR17.1 TR18.1 TR19.1 TR20.1
LV5: CON11.1 R41.2 R43.2 R45.2 R47.2 TR21.1 TR22.1 TR23.1 TR24.1
LV6: CON13.1 R49.2 R51.2 R53.2 R55.2 TR25.1 TR26.1 TR27.1 TR28.1
LV7: CON15.1 R57.2 R59.2 R61.2 R63.2 TR29.1 TR30.1 TR31.1 TR32.1
LV8: CON17.1 R65.2 R67.2 R69.2 R71.2 TR33.1 TR34.1 TR35.1 TR36.1
LV9: CON19.1 R73.2 R75.2 R77.2 R79.2 TR37.1 TR38.1 TR39.1 TR40.1
LV10: CON21.1 R81.2 R83.2 R85.2 R87.2 TR41.1 TR42.1 TR43.1 TR44.1
LV11: CON23.1 R89.2 R91.2 R93.2 R95.2 TR45.1 TR46.1 TR47.1 TR48.1
LV12: CON25.1 R97.2 R99.2 R101.2 R103.2 TR49.1 TR50.1 TR51.1 TR52.1
LV13: CON27.1 R105.2 R107.2 R109.2 R111.2 TR53.1 TR54.1 TR55.1 TR56.1
LV14: CON29.1 R113.2 R115.2 R117.2 R119.2 TR57.1 TR58.1 TR59.1 TR60.1
LV15: CON31.1 R121.2 R123.2 R125.2 R127.2 TR61.1 TR62.1 TR63.1 TR64.1
LV16: CON33.1 R129.2 R131.2 R133.2 R135.2 TR65.1 TR66.1 TR67.1 TR68.1
LV17: CON35.1 R137.2 R139.2 R141.2 R143.2 TR69.1 TR70.1 TR71.1 TR72.1
LV18: CON37.1 R145.2 R147.2 R149.2 R151.2 TR73.1 TR74.1 TR75.1 TR76.1
LV19: CON39.1 R153.2 R155.2 R157.2 R159.2 TR77.1 TR78.1 TR79.1 TR80.1